# EAGLE board check_battery_12Volts_MASTER (EAGLE 9.5.2)
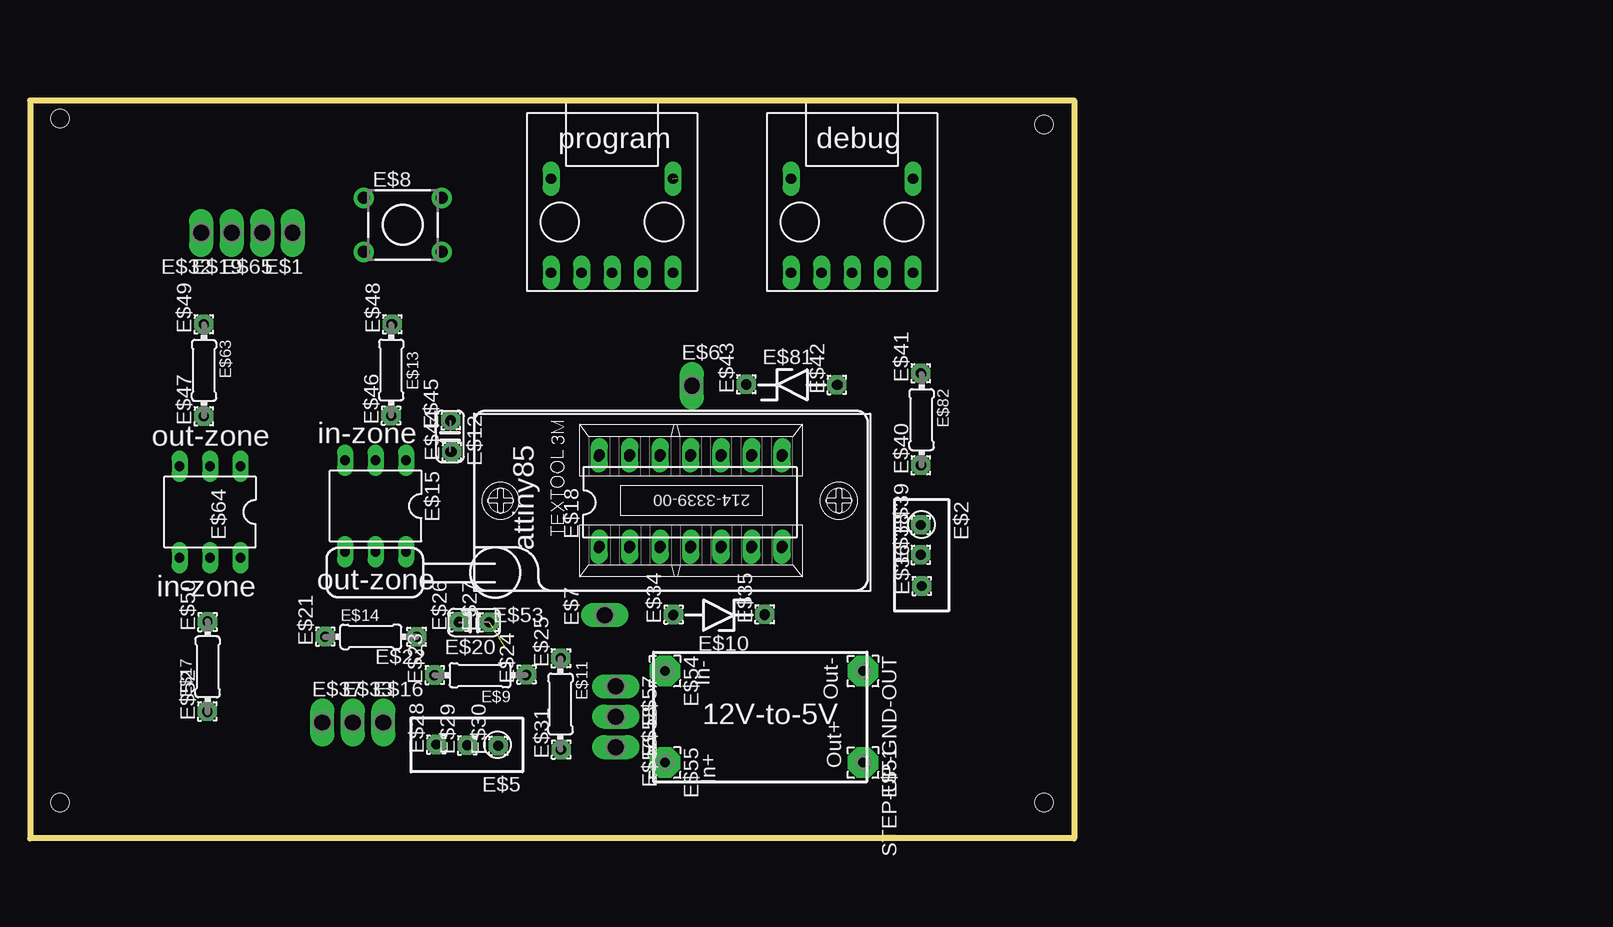
[diagram p0: board, top side]
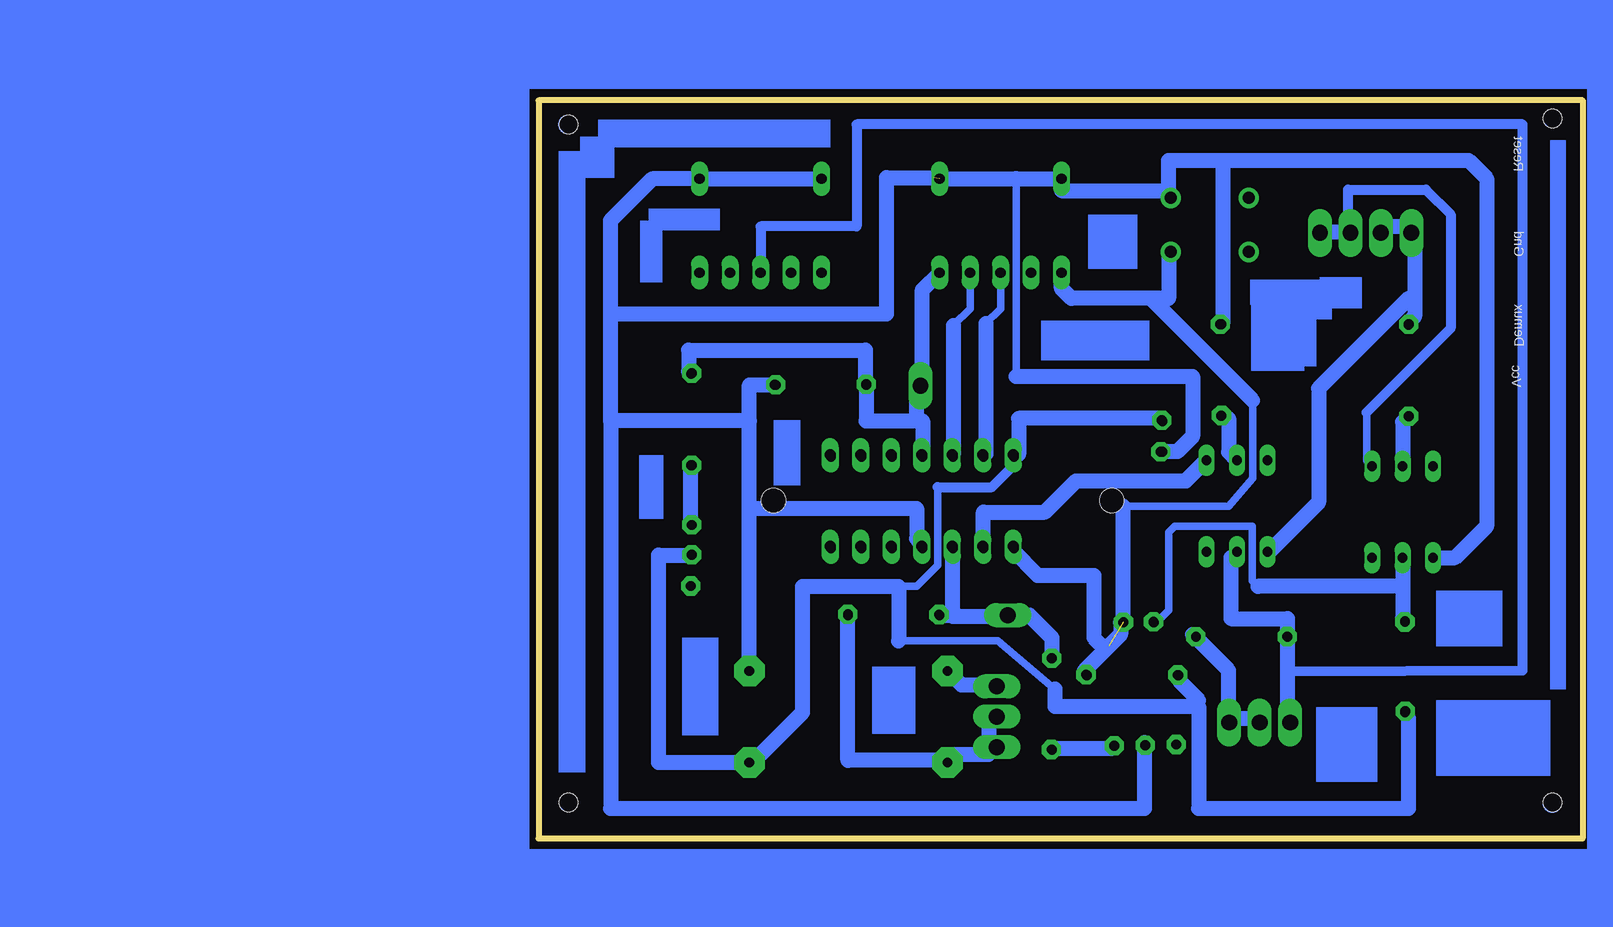
[diagram p1: board, bottom side, seen from below]

Size 87 x 61.5 mm. Coordinates in mm from the lower left corner, seen from the top.
Outline: 0,61.5 87,61.5 87,0 0,0 0,61.5
Copper layers (1*16): Top 0.035mm / dielectric 1.5mm / Bottom 0.035mm
Design rules "default": minimum track width 10mil, minimum drill 24mil, track to track 8mil, track to pad 8mil, pad to pad 8mil, via to via 8mil, smd to smd 8mil, copper to edge 40mil, drill to drill 8mil, minimum pad ring 10mil, minimum via ring 8mil, stop-mask expansion 4mil, vias tented up to drill 0mil, thermal gap 10mil
Holes 1.5 mm at 2.5,60 84.5,59.5 84.5,3 2.5,3

## Footprints (pad centres in the part's own frame; a part is rotated, then mirrored left to right if it is on the bottom)
P1-13Y = drill 1.321 pad 1.905 long: TP 0,0
RTRIM3296W = drill 0.61: 1 0,-2.54; 2 0,0; 3 0,2.54
USB-MICRO-PCB = drill 0.85 pad 1.422 long: P$1 -5.08,6.35; P$2 -2.54,6.35; P$3 0,6.35; P$4 2.54,6.35; P$5 5.08,6.35; P$6 -5.08,-1.47; P$7 5.08,-1.47
TL1105 = drill 1 pad 1.676: 1 -2.25,3.25; 2 2.25,3.25; 3 -2.25,-3.25; 4 2.25,-3.25
0204/7 = drill 0.813 octagon: 1 -3.81,0; 2 3.81,0
ZDIO-7.5 = drill 0.813 octagon: A 3.81,0; C -3.81,0
C025-024X044 = drill 0.813 octagon: 1 -1.27,0; 2 1.27,0
DIL06 = drill 0.813 long: 1 -2.54,-3.81; 2 0,-3.81; 3 2.54,-3.81; 4 2.54,3.81; 5 0,3.81; 6 -2.54,3.81
DIL14 = drill 0.813 long: 1 -7.62,-3.81; 2 -5.08,-3.81; 3 -2.54,-3.81; 4 0,-3.81; 5 2.54,-3.81; 6 5.08,-3.81; 7 7.62,-3.81; 8 7.62,3.81; 9 5.08,3.81; 10 2.54,3.81; 11 0,3.81; 12 -2.54,3.81; 13 -5.08,3.81; 14 -7.62,3.81
1,6/0,8 = drill 0.813 pad 1.6 octagon: 1 0,0
2,54/0,8 = drill 0.813 pad 2.54 octagon: 1 0,0
214-3339-00-0602J = drill 0.9 long: 1 -7.62,-3.81; 2 -5.08,-3.81; 3 -2.54,-3.81; 4 0,-3.81; 5 2.54,-3.81; 6 5.08,-3.81; 7 7.62,-3.81; 8 7.62,3.81; 9 5.08,3.81; 10 2.54,3.81; 11 0,3.81; 12 -2.54,3.81; 13 -5.08,3.81; 14 -7.62,3.81 | hole 2: 12.35,0; -15.85,0

## Placement (x,y rotation side)
E$1  [P1-13Y]  21.88,50.46 180 top
E$2  501  [RTRIM3296W]  74.3,23.6 180 top
E$3  program  [USB-MICRO-PCB]  48.5,53.5 180 top
E$4  [USB-MICRO-PCB]  68.5,53.5 180 top
E$5  105  [RTRIM3296W]  36.4,7.8 90 top
E$6  [P1-13Y]  55.16,37.73 0 top
E$7  [P1-13Y]  47.9,18.6 90 top
E$8  SWITCH-RESET  [TL1105]  31.07,51.12 270 top
E$9  10K  [0204/7]  37.5,13.6 180 top
E$10  zener 10v  [ZDIO-7.5]  57.4,18.6 180 top
E$11  470  [0204/7]  44.2,11.2 270 top
E$12  1uF  [C025-024X044]  35,33.5 270 top
E$13  220  [0204/7]  30.1,39.03 270 top
E$14  10K  [0204/7]  28.4,16.8 0 top
E$15  SERIAL  [DIL06]  28.8,27.7 180 top
E$16  [P1-13Y]  29.44,9.66 0 top
E$17  2.2k  [0204/7]  14.8,14.3 90 top
E$18  [DIL14]  55,28 0 top
E$19  [P1-13Y]  16.8,50.46 180 top
E$20  0.1uF  [C025-024X044]  37,18 180 top
E$21  [1,6/0,8]  24.6,16.82 90 top
E$22  [1,6/0,8]  32.22,16.81 180 top
E$23  [1,6/0,8]  33.73,13.62 90 top
E$24  [1,6/0,8]  41.37,13.65 90 top
E$25  [1,6/0,8]  44.24,15.02 90 top
E$26  [1,6/0,8]  35.75,18.05 90 top
E$27  [1,6/0,8]  38.26,18.01 90 top
E$28  [1,6/0,8]  33.85,7.82 90 top
E$29  [1,6/0,8]  36.43,7.75 90 top
E$30  [1,6/0,8]  39.02,7.72 90 top
E$31  [1,6/0,8]  44.26,7.41 90 top
E$32  [P1-13Y]  14.26,50.46 180 top
E$33  [P1-13Y]  26.9,9.66 0 top
E$34  [1,6/0,8]  53.62,18.65 90 top
E$35  [1,6/0,8]  61.22,18.67 90 top
E$36  [1,6/0,8]  74.31,21.03 90 top
E$37  SERIAL OUT  [P1-13Y]  24.36,9.66 0 top
E$38  [1,6/0,8]  74.24,23.63 90 top
E$39  [1,6/0,8]  74.24,26.13 90 top
E$40  [1,6/0,8]  74.24,31.1 90 top
E$41  [1,6/0,8]  74.24,38.76 90 top
E$42  [1,6/0,8]  67.23,37.79 90 top
E$43  [1,6/0,8]  59.68,37.84 90 top
E$44  [1,6/0,8]  35.14,32.22 90 top
E$45  [1,6/0,8]  35.05,34.84 90 top
E$46  [1,6/0,8]  30.08,35.25 90 top
E$47  [1,6/0,8]  14.48,35.19 90 top
E$48  [1,6/0,8]  30.19,42.85 90 top
E$49  [1,6/0,8]  14.48,42.85 90 top
E$50  [1,6/0,8]  14.8,18.04 90 top
E$51  [2,54/0,8]  69.43,6.32 270 top
E$52  [1,6/0,8]  14.77,10.59 90 top
E$53  [214-3339-00-0602J]  55.07,28.15 0 top
E$54  [2,54/0,8]  52.92,13.94 270 top
E$55  [2,54/0,8]  52.92,6.32 270 top
E$56  [P1-13Y]  48.82,7.6 270 top
E$57  [P1-13Y]  48.82,12.68 270 top
E$58  [P1-13Y]  48.82,10.14 270 top
E$63  220  [0204/7]  14.5,39 270 top
E$64  RESET  [DIL06]  15,27.2 180 top
E$65  [P1-13Y]  19.34,50.46 180 top
E$81  zener 3.9v  [ZDIO-7.5]  63.5,37.8 0 top
E$82  100  [0204/7]  74.3,34.9 270 top
STEP-UP-GND-OUT  [2,54/0,8]  69.43,13.94 270 top

## Library data of the parts
E$1 E$6 E$7 E$16 E$19 E$32 E$33 E$37 E$56-E$58 E$65 = testpad
E$2 E$5 E$12 E$20 = rcl
E$3 E$4 = LSGPackages
E$8 = switch
E$9 E$11 E$13 E$14 E$17 E$63 E$82 = eagle-ltspice
E$10 E$81 = ref-packages-longpad
E$15 E$64 = ic-package
E$18 = 74ac-logic
E$21-E$31 E$34-E$36 E$38-E$52 E$54 E$55 STEP-UP-GND-OUT = wirepad
E$53 = con-3m

## Nets
IN-5V-FROM-NANO-SDCARD: E$14.2 E$16.TP E$33.TP
IN-12V-BATTERY: E$10.C E$55.1 E$56.TP E$58.TP
IN-GND-BATTERY: E$3.P$6 E$3.P$7 E$4.P$6 E$4.P$7 E$5.2 E$8.1 E$12.2 E$13.1 E$18.4 E$64.4 E$81.A STEP-UP-GND-OUT.1
IN-GROUND: E$15.4 E$19.TP E$32.TP E$63.1
IN-GROUND-BATTERY: E$54.1 E$57.TP
IN-TO-RESET-ATTINY85: E$1.TP E$64.1 E$65.TP
S$2: E$2.1 E$82.2
S$3: E$5.1 E$11.2
S$4: E$3.P$5 E$8.2 E$9.1 E$18.1 E$20.1
S$5: E$3.P$2 E$18.12
S$7: E$3.P$3 E$18.13
S$8: E$17.2 E$20.2 E$64.5
S$9: E$13.2 E$15.2
S$10: E$3.P$1 E$6.TP E$18.11 E$81.C E$82.1
S$15: E$63.2 E$64.2
SERIAL-OUT: E$4.P$3 E$14.1 E$15.5 E$37.TP
TX-SERIAL-DATA: E$15.1 E$18.2
VZ-ANALOG-REFERENCE: E$2.2 E$9.2 E$12.1 E$17.1 E$18.14 E$51.1
VZ-BATTERY-LEVEL: E$7.TP E$10.A E$11.1 E$18.3

## Tracks (layer width: path | path; a pad name or v marks a point on that pad's centre or on a via)
IN-5V-FROM-NANO-SDCARD
  Bottom 0.254: 32.5,17 E$14.2
  Bottom 0.61: 29.5,10 E$16.TP
  Bottom 1.27: 32.5,17 29.5,14 29.5,10 | E$33.TP 27.5,10 28.5,10 E$16.TP
IN-12V-BATTERY
  Bottom 0.254: 49.5,7 E$56.TP | 52.5,7 E$55.1
  Bottom 0.813: E$55.1 52.92,6.5
  Bottom 1.27: E$10.C 61.21,6.5 52.92,6.5 | E$56.TP 49.5,8 49.5,10 E$58.TP | 52.5,7 49.5,7
IN-GND-BATTERY  (1 unrouted)
  Bottom 0.254: 34.5,54 E$8.1 | 30,42.88 E$13.1 | 36.5,8 E$5.2 | 69.5,26 69.43,27.5
  Bottom 0.61: 47.2,54.98 47.2,38.5
  Bottom 1.27: STEP-UP-GND-OUT.1 69.43,27.5 | 69.43,27.5 69.43,34.8 | 69.43,34.8 69.43,37.8 E$81.A | 47.2,38.5 32.5,38.5 32.5,33.5 33.77,32.23 E$12.2 | E$64.4 10.61,23.39 8,26 8,55 9.5,56.5 30,56.5 | 30,56.5 34.5,56.5 34.5,54 | 30,56.5 30,42.88 | E$8.1 34.93,53.98 43.42,53.98 E$3.P$7 43.43,54.98 47.2,54.98 53.57,54.98 E$3.P$6 | E$4.P$7 E$4.P$6 77.53,54.97 81,51.5 81,43.7 | 36.5,8 36.5,2.5 81,2.5 81,34.8 | 69.43,34.8 81,34.8 | 69.43,27.5 55.5,27.5 55.5,25 E$18.4 | 81,34.8 81,43.7 | 54.08,55.06 58,55.06 58,43.7 81,43.7
IN-GROUND
  Bottom 0.254: E$15.4 26.16,23.84 | 14.5,45 14.5,43 E$63.1
  Bottom 0.61: 16.5,51 E$19.TP | E$32.TP 14,50.2
  Bottom 1.27: 16.5,51 14.5,51 E$32.TP | 26.16,23.84 22,28 22,37.5 14.5,45 | 14.5,43 14,43.5 14,50.2
IN-GROUND-BATTERY
  Bottom 1.27: E$57.TP 48.82,12.79 51.76,12.79 E$54.1
IN-TO-RESET-ATTINY85
  Bottom 0.254: 21.85,50.5 E$1.TP
  Bottom 0.61: 18,35.5 18,31.47 E$64.1
  Bottom 0.813: 18,35.5 11,42.5 11,52 13.06,54.06 19.54,54.06 19.54,50.66 E$65.TP
  Bottom 1.27: 21.85,50.5 19.35,50.5 E$65.TP
S$2
  Bottom 1.27: E$2.1 E$82.2
S$3
  Bottom 0.254: 44.25,7.5 E$11.2
  Bottom 0.813: E$5.1 39.24,7.5
  Bottom 1.27: 44.25,7.5 39.24,7.5
S$4  (1 unrouted)
  Bottom 0.254: 42.59,45 42.93,44.66 | 34.5,49 E$8.2 | 47.5,24 E$18.1 | 38.5,18 38.29,18 E$20.1
  Bottom 0.61: 41.5,14 E$9.1 | 27.5,36.5 27.5,30 29.48,27.69 38.29,27.69
  Bottom 1.27: 36,45 34.5,45 34.5,49 | 36,45 42.59,45 43.42,45.84 E$3.P$5 | 39.5,16 41.5,14 | 38.5,18 38.5,17 39.74,15.76 40.71,16.73 40.71,21.92 45.42,21.92 47.5,24 | 27.5,36.5 36,45 | 38.29,18 38.29,27.69
S$5
  Bottom 0.254: 52.5,32 E$18.12
  Bottom 0.61: 52.44,32.06 52.5,32 | 52.44,42.76 51.04,44.15 E$3.P$2
  Bottom 1.27: 52.44,42.76 52.44,32.06
S$7
  Bottom 0.61: 49.71,42.91 48.49,44.14 48.49,47.14 E$3.P$3
  Bottom 1.27: 49.71,42.91 49.71,32.02 E$18.13
S$8
  Bottom 0.254: 35.5,18 E$20.2
  Bottom 0.61: E$17.2 15,18.31 | 35.5,18 34.5,19 34.5,25.5 34,26 27.52,26 27.52,21.46 27.06,21
  Bottom 1.27: E$64.5 15,21 | 15,21 15,18.31 | 15,21 27.06,21
S$9
  Bottom 1.27: E$15.2 29.5,32.21 29.5,35 E$13.2
S$10
  Bottom 0.61: 55.5,34.8 55,34.8
  Bottom 0.813: E$82.1 74.5,38.91
  Bottom 1.27: 55,34.8 E$18.11 | 74.5,38.91 74.5,40.69 59.77,40.69 59.77,37.88 E$81.C 59.69,34.8 55.5,34.8 55.5,37 E$6.TP 55.01,37.79 55.01,45.72 E$3.P$1
S$15
  Bottom 1.27: E$63.2 15,34.69 E$64.2
SERIAL-OUT
  Bottom 0.254: 24.48,13.93 E$14.1
  Bottom 0.61: E$15.5 29.3,23.39
  Bottom 0.813: E$4.P$3 68.5,51 60.5,51 60.5,59.5 5,59.5 5,14 24.48,13.93
  Bottom 1.27: 29.3,23.39 29.3,18.32 24.59,18.32 E$14.1 24.59,9.66 E$37.TP
TX-SERIAL-DATA
  Bottom 1.27: E$18.2 49.92,27.19 44.81,27.19 42.21,29.79 33.06,29.79 E$15.1
VZ-ANALOG-REFERENCE
  Bottom 0.254: 14.5,10 E$17.1 | 33.5,13 E$9.2
  Bottom 0.508: E$12.1 35.23,35
  Bottom 0.61: 32,11.5 32,11 | 47,32 E$18.14 47.5,31 | 53.75,29.27 53.75,22.75 55.5,21 57,21 | 68.5,7 E$51.1 | 43.98,12.45 44.01,12.48 48.74,16.46 57,16.46
  Bottom 0.813: 47.5,31 49.23,29.27 53.75,29.27
  Bottom 1.27: E$51.1 77,6.32 77,23.6 E$2.2 | 14.5,10 14.5,2.5 32,2.5 32,11 43.98,11 43.98,12.45 | 33.5,13 32,11.5 | 47,32 47,35 35.23,35 | 68.5,7 65,10.5 65,21 57,21 57,16.46
VZ-BATTERY-LEVEL
  Bottom 0.254: 52.5,19 52.46,19
  Bottom 0.61: 52.46,18.6 52.46,19 | E$7.TP 48,18.5
  Bottom 0.813: E$7.TP 46.1,18.6
  Bottom 1.27: E$10.A 52.46,18.6 | E$18.3 52.46,19 52.46,18.5 48,18.5 | 46.1,18.6 44.2,16.7 E$11.1
(copper drawn outside any net)
  shapes: Bottom area x26, Bottom circle x4

## Text on the board
tPlace: program | debug | out-zone | in-zone | attiny85 | out-zone | in-zone | In- | Out- | 12V-to-5V | In+ | Out+
bPlace: Reset | Gnd | Demux | Vcc